# Altium PCB PCB2.PcbDoc
Units mil, origin at the board's own origin, x right, y up, seen from the top; angles counter-clockwise.
Board outline 6000 x 4000 mil, 2 copper layers (Top Layer, Bottom Layer); 37 components, 28 nets, 195 pads, 0 vias.
Unrouted connection lines stored in the file: 120.
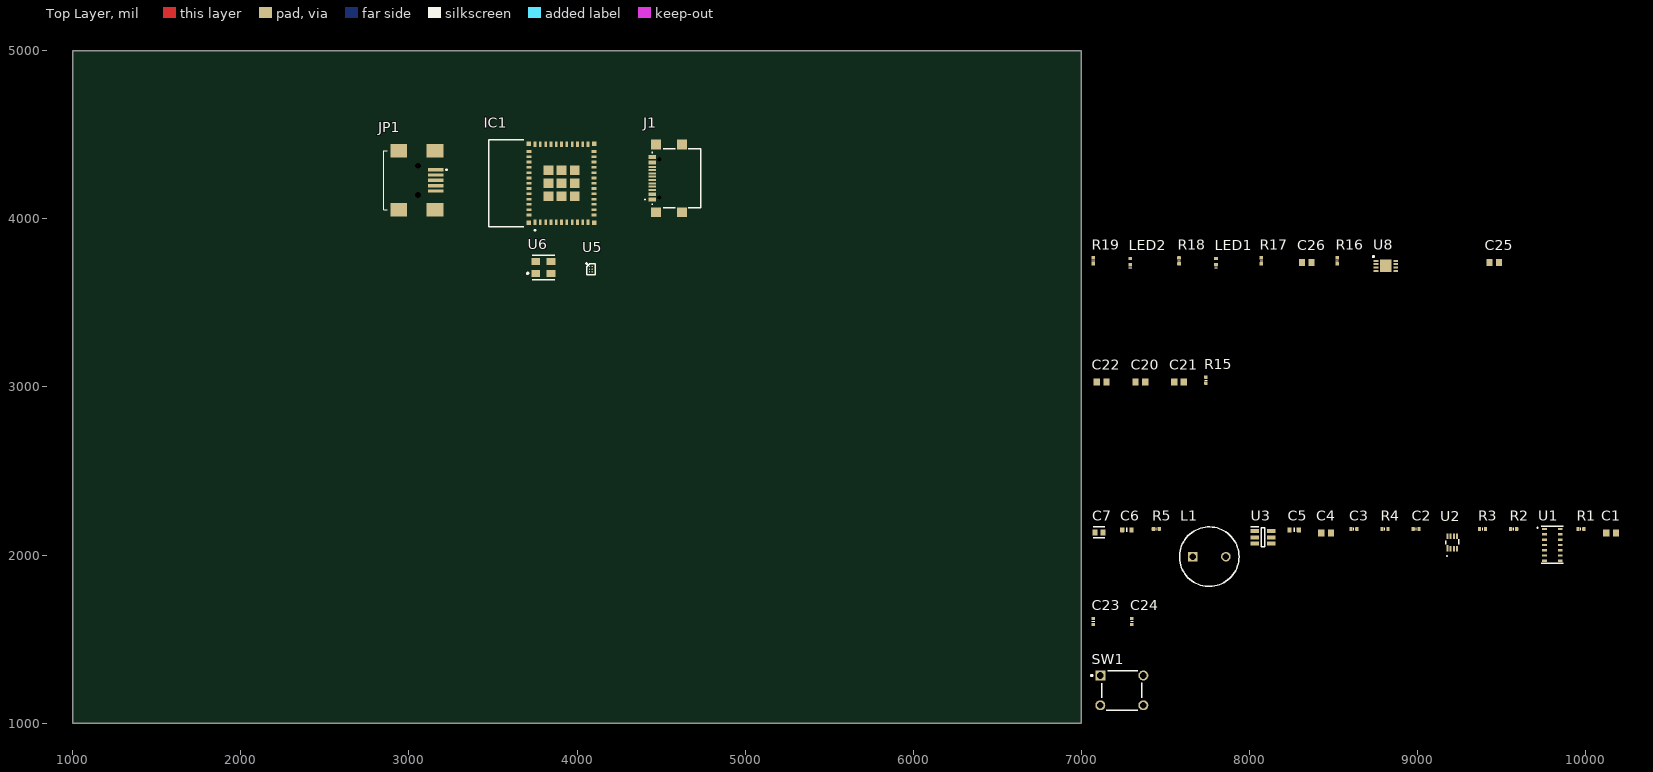
[diagram p0: Top Layer view]
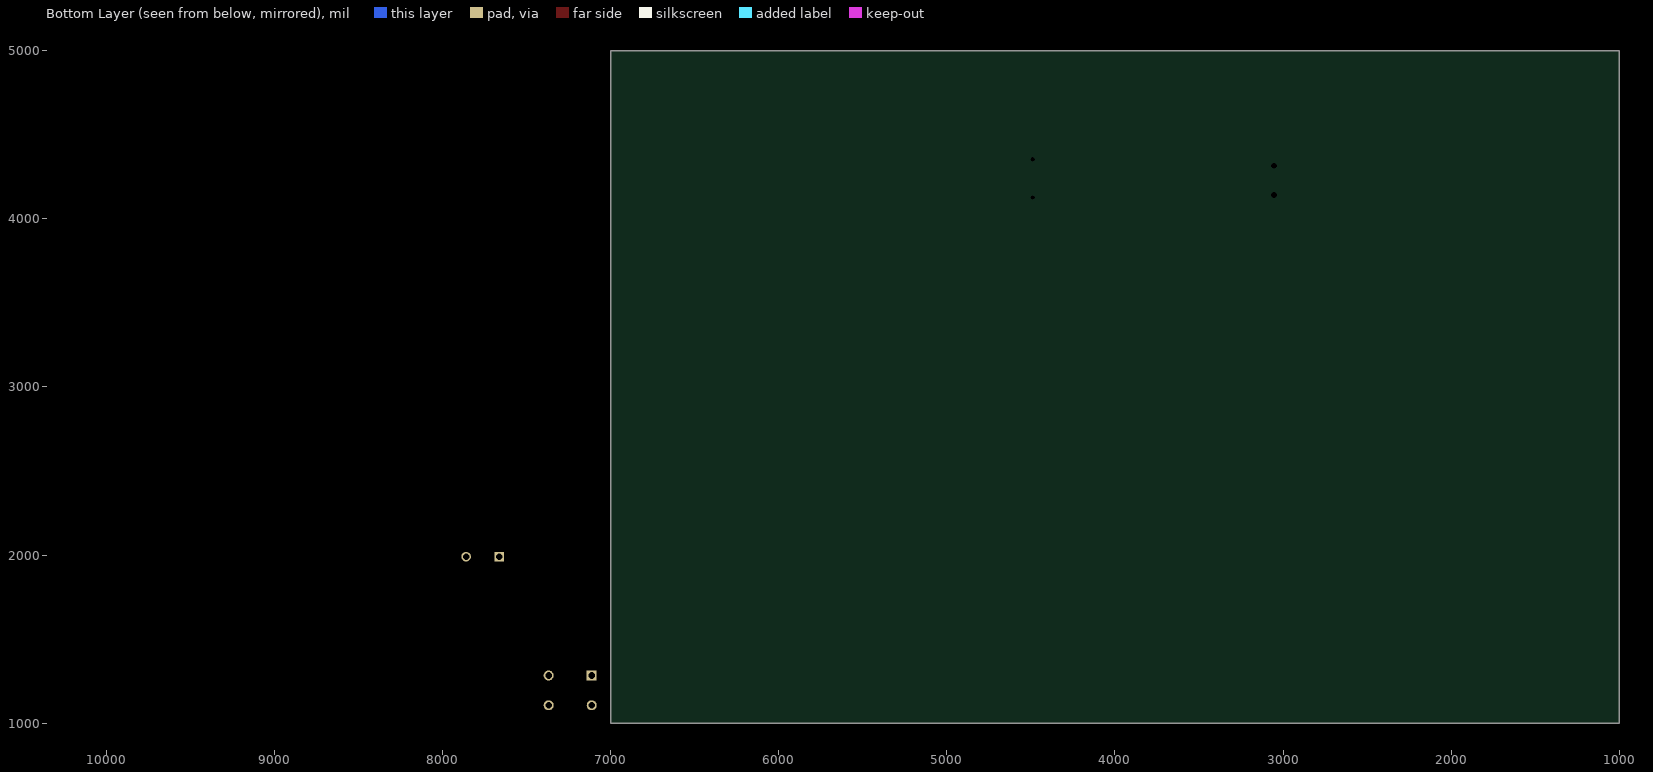
[diagram p1: Bottom Layer view, seen from below]

## Layer stack, top to bottom
Top Solder: solder mask 0.4, Solder Resist, Dk 3.5
Top Layer: signal copper 1.4
Dielectric 1: dielectric 12.6, FR-4, Dk 4.8
Bottom Layer: signal copper 1.4
Bottom Solder: solder mask 0.4, Solder Resist, Dk 3.5

## Board outline
1000,1000 7000,1000 7000,5000 1000,5000

## Design rules (kind name [scope] priority, off if disabled: settings)
Clearance [All] p1: gap=10 ignorepadtopadclearanceinfootprint=FALSE
PolygonConnect [All] p1: connectstyle=Relief reliefconductorwidth=10 reliefentries=4 polygonreliefangle="90 Angle" airgapwidth=10
RoutingVias [All] p1: holewidth=28 width=50 viastyle="Through Hole" minholewidth=28 minwidth=50 maxholewidth=28 maxwidth=50
SolderMaskExpansion [All] p1: expansion=4 istentingtop=FALSE
Width [All] p1: maxlimit=10 minlimit=10 preferedwidth=10
30 further rules are at their usual default settings.

## Classes and differential pairs
component class "Temp sensor": R12 R13 R14 U5
component class Protocol: JP1
component class Power: C25 C26 J1 LED1 LED2 R16 R17 R18 R19 U8
component class Microcontroller: C20 C21 C22 IC1 R15
component class "Heart rate and pulse oximeter": C1 C2 C3 C4 C5 C6 C7 L1 R1 R2 R3 R4 R5 U1 U2 U3
component class "Crystal Oscillator": C23 C24 U6
component class Button: SW1

## Components (designator, comment, footprint, x,y, rotation, side; value= is the part's Value field where it differs from the comment)
C1 "0.1uF" CAPC1608X90X35ML10T15 10150,2130 r0 top
C2 "Capacitor 1µF +/-20% 10V 0402" CAPC0402(1005)60_L 8990,2155 r0 top value=1µF
C3 "Capacitor 1µF +/-20% 10V 0402" CAPC0402(1005)60_L 8620,2155 r0 top value=1µF
C4 "0.1uF" CAPC1608X90X35ML10T15 8455,2130 r0 top
C5 "Capacitor 4.7µF +/-20% 10V 0603" CAPC0603(1608)100_L 8265,2150 r0 top value=4.7µF
C6 "Capacitor 4.7µF +/-20% 10V 0603" CAPC0603(1608)100_L 7270,2150 r0 top value=4.7µF
C7 "5.6nF" FP-C0603C-CF-MFG 7105,2135 r0 top value="5,600 pF"
C20 "0.1uF" CAPC1608X90X35ML10T15 7350,3030 r0 top
C21 "0.1uF" CAPC1608X90X35ML10T15 7580,3030 r0 top
C22 "0.1uF" CAPC1608X90X35ML10T15 7120,3030 r0 top
C23 "Capacitor 12pF +/-10% 50V 0402" CAPC0402(1005)33_L 7070,1605 r90 top value=12pF
C24 "Capacitor 12pF +/-10% 50V 0402" CAPC0402(1005)33_L 7300,1605 r90 top value=12pF
C25 "10uF" CAPC1608X90X35ML10T15 9455,3740 r0 top
C26 "10uF" CAPC1608X90X35ML10T15 8340,3740 r0 top
IC1 "ESP32-C3-MINI-1-H4" ESP32C3MINI1H4 3907.91,4211.02 r90 top
J1 "GSB1C41110SSHR" GSB1C41110SSHR 4580,4240 r90 top
JP1 "690-005-299-043" 690005299043 2850.28,4228.39 r0 top
L1 "RLB9012-472KL" INDR70-500-1220X900X1220 7760,1990 r0 top value=4.7µH
LED1 "QBLP595-Y" QTB-QBLP595_V 7800,3745 r90 top
LED2 "QBLP595-Y" QTB-QBLP595_V 7290,3745 r90 top
R1 "4D7KR2F" RESC0402(1005)_L 9970,2155 r0 top value=4.7k
R2 "4D7KR2F" RESC0402(1005)_L 9570,2155 r0 top value=4.7k
R3 "4D7KR2F" RESC0402(1005)_L 9385,2155 r0 top value=4.7k
R4 "4D7KR2F" RESC0402(1005)_L 8805,2155 r0 top value=4.7k
R5 "4D7KR2F" RESC0402(1005)_L 7445,2155 r0 top value=4.7k
R15 "Resistor 2K2  +/-5 % 0402 63 mW" RESC0402(1005)_L 7740,3040 r90 top value=2.2k
R16 "2KR2J" RESC0402(1005)_L 8520,3750 r90 top value=2k
R17 "Resistor 4K7  +/-1 % 0402 63 mW" RESC0402(1005)_L 8070,3750 r90 top value=4.7k
R18 "1KR2J" RESC0402(1005)_L 7580,3750 r90 top value=1k
R19 "Resistor 4K7  +/-1 % 0402 63 mW" RESC0402(1005)_L 7070,3750 r90 top value=4.7k
SW1 "B3F-1000" OMRON-B3F-1000-4_V 7240,1195 r0 top
U1 "MAX30102EFD+" 14-LEAD-OESIP 9800,2060 r0 top
U2 "MAX14595ETA+" MAX14595ETA 9205,2075 r0 top
U3 "MAX1921EUT18+" SOT95P280X145-6N 8080,2105 r0 top
U5 "TMP119AIYBGR" BGA6C40P2X3_95X149X52 4082.13,3700 r0 top
U6 "ABM8-27.120MHZ-B4-T" FP-ABM8-MFG 3800,3710 r0 top
U8 "MCP73831-2DCI_MC" SON50P300X200X100-9N-D 8810,3720 r0 top

## Footprints (in the part's own frame and the unit in brackets; to place one, negate y for a bottom-side part, rotate by r counter-clockwise, add the part's x,y. Pads: shape width x height; smd on the part's side, far side on the other; paste and mask are expansions set on the pad)
14-LEAD-OESIP [mm]
  rect 0.75x0.35 smd: 1(-1.2,2.4) 2(-1.2,1.6) 3(-1.2,0.8) 4(-1.2,0) 5(-1.2,-0.8) 6(-1.2,-1.6) 7(-1.2,-2.4) 8(1.2,-2.4) 9(1.2,-1.6) 10(1.2,-0.8) 11(1.2,0) 12(1.2,0.8) 13(1.2,1.6) 14(1.2,2.4)
  silkscreen extent -2.28,-2.8 1.65,2.8, body extent -1.4,-2.8 1.4,2.8, height 1.3
690005299043 [mm]
  rect 2.3x0.5 smd: 1(7.85,1.6) 2(7.85,0.8) 3(7.85,0) 4(7.85,-0.8) 5(7.85,-1.6)
  rect 2.5x2 smd: 6(7.75,-4.45) 7(7.75,4.45) 8(2.25,4.45) 9(2.25,-4.45)
  round 0.45 hole 0.9 unplated: 10(5.2,2.2) 11(5.2,-2.2)
  silkscreen extent 0,-4.45 9.6,4.45, body extent -0.54,-5.13 8.76,5.13, height 3.9
BGA6C40P2X3_95X149X52 [mm]
  round 0.2 smd: A1(-0.2,0.4) A2(0.2,0.4) B1(-0.2,0) B2(0.2,0) C1(-0.2,-0.4) C2(0.2,-0.4)
  silkscreen extent -0.75,-0.85 0.65,0.95, body extent -0.48,-0.74 0.48,0.74, height 0.53
CAPC0402(1005)33_L [mm] "Chip Capacitor, Body 1.0x0.5mm, Height 0.33mm, IPC High Density"
  rrect25% 0.5x0.55 smd: 1(-0.45,0) 2(0.45,0)
  silkscreen extent 0,-0.2 0,0.2, body extent -0.5,-0.25 0.5,0.25, height 0.55
CAPC0402(1005)60_L [mm] "Chip Capacitor, Body 1.0x0.5mm, Height 0.6mm, IPC High Density"
  rrect25% 0.5x0.55 smd: 1(-0.45,0) 2(0.45,0)
  silkscreen extent 0,-0.2 0,0.2, body extent -0.5,-0.25 0.5,0.25, height 0.6
CAPC0603(1608)100_L [mm] "Chip Capacitor, Body 1.6x0.8mm, Height 1.0mm, IPC High Density"
  rrect25% 0.66x0.76 smd: 1(-0.7,0) 2(0.7,0)
  silkscreen extent 0,-0.3 0,0.3, body extent -0.8,-0.4 0.8,0.4, height 0.95
CAPC1608X90X35ML10T15 [mm] "Chip Capacitor, 2-Leads, Body 1.7x0.9mm, IPC Low Density"
  rect 0.95x1.05 smd: 1(-0.725,0) 2(0.725,0)
  body extent -0.85,-0.45 0.85,0.45, height 0.9
ESP32C3MINI1H4 [mm]
  rect 0.8x0.4 smd: 1(-5.9,4) 2(-5.9,3.2) 3(-5.9,2.4) 4(-5.9,1.6) 5(-5.9,0.8) 6(-5.9,0) 7(-5.9,-0.8) 8(-5.9,-1.6) 9(-5.9,-2.4) 10(-5.9,-3.2) 11(-5.9,-4) 25(5.9,-4) 26(5.9,-3.2) 27(5.9,-2.4) 28(5.9,-1.6) 29(5.9,-0.8) 30(5.9,0) 31(5.9,0.8) 32(5.9,1.6) 33(5.9,2.4) 34(5.9,3.2) 35(5.9,4)
  rect 0.4x0.8 smd: 12(-4.8,-4.9) 13(-4,-4.9) 14(-3.2,-4.9) 15(-2.4,-4.9) 16(-1.6,-4.9) 17(-0.8,-4.9) 18(0,-4.9) 19(0.8,-4.9) 20(1.6,-4.9) 21(2.4,-4.9) 22(3.2,-4.9) 23(4,-4.9) 24(4.8,-4.9) 36(4.8,4.9) 37(4,4.9) 38(3.2,4.9) 39(2.4,4.9) 40(1.6,4.9) 41(0.8,4.9) 42(0,4.9) 43(-0.8,4.9) 44(-1.6,4.9) 45(-2.4,4.9) 46(-3.2,4.9) 47(-4,4.9) 48(-4.8,4.9)
  rect 1.45x1.45 smd: 49(0,0) 50(1.975,1.975) 51(0,1.975) 52(-1.975,1.975) 53(-1.975,0) 54(-1.975,-1.975) 55(0,-1.975) 56(1.975,-1.975) 57(1.975,0)
  rect 0.7x0.7 smd: 58(-5.95,4.95) 59(-5.95,-4.95) 60(5.95,-4.95) 61(5.95,4.95)
  silkscreen extent -7.2,3.9 6.6,11, body extent -6.6,-5.6 6.6,11, height 2.4
FP-ABM8-MFG [mm]
  rect 1.3x1.05 smd paste+0 mask+0: 1(-1.15,-0.875) 2(1.15,-0.875) 3(1.15,0.875) 4(-1.15,0.875)
  silkscreen extent -2.5,-1.88 1.7,1.88, body extent -1.9,-1.5 1.9,1.5, height 0.25
FP-C0603C-CF-MFG [mm]
  rect 0.75x0.9 smd paste+0 mask+0: 1(-0.6,0) 2(0.6,0)
  silkscreen extent -0.87,-0.85 0.88,0.85, body extent -1.2,-0.6 1.2,0.6, height 0.25
GSB1C41110SSHR [mm]
  rect 0.6x1.15 smd: A1(-3.2,3.39) A4(-2.4,3.39) A9(2.4,3.39) A12(3.2,3.39)
  rect 0.3x1.15 smd: A5(-1.25,3.39) A6(-0.25,3.39) A7(0.25,3.39) A8(1.25,3.39) B5(1.75,3.39) B6(0.75,3.39) B7(-0.75,3.39) B8(-1.75,3.39)
  round 0.325 hole 0.65 unplated: MH1(-2.89,2.315) MH2(2.89,2.315)
  rect 1.5x1.5 smd: MP1(-5.12,2.815) MP2(5.12,2.815) MP3(-5.12,-1.115) MP4(5.12,-1.115)
  silkscreen extent -4.47,-3.97 4.47,4.5, body extent -5.67,-4.09 5.67,3.51, height 3.12
INDR70-500-1220X900X1220 [mm] "THD, 2-Leads, Dia 9mm"
  rect 1.45x1.45 hole 0.95: 1(-2.5,0)
  round 1.45 hole 0.95: 2(2.5,0)
  silkscreen extent -4.5,-4.5 4.5,4.5, body extent -4.5,-4.5 4.5,4.5, height 12.2
MAX14595ETA [mm]
  rect 0.3x0.95 smd: 1(-0.75,-0.9)
  rect 0.3x0.85 smd: 2(-0.25,-0.95) 3(0.25,-0.95) 4(0.75,-0.95) 5(0.75,0.95) 6(0.25,0.95) 7(-0.25,0.95) 8(-0.75,0.95)
  silkscreen extent -1,-2.1 1,0.5, body extent -1,-1 1,1, height 0.9
OMRON-B3F-1000-4_V [mm] "TH, 4-Leads, Body 6x6mm"
  rect 1.5x1.5 hole 1 paste-2539.97: 1(-3.25,2.25)
  round 1.5 hole 1 paste-2539.97: 2(3.25,2.25) 4(3.25,-2.25)
  round 1.5 hole 1 paste-2539.97 mask+0.102: 3(-3.25,-2.25)
  silkscreen extent -4.67,-3 3,3, body extent -3,-3 3,3, height 4.5
QTB-QBLP595_V [mm] "SMD, 2-Leads, Body 1x0.5mm"
  rrect25% 0.5x0.55 smd: 1(-0.455,0) 2(0.455,0)
  silkscreen extent -0.9,-0.2 -0.9,0.2, body extent -0.5,-0.25 0.5,0.25, height 0.5
RESC0402(1005)_L [mm] "Chip Resistor, Body 1.0x0.5mm, IPC High Density"
  rrect25% 0.5x0.55 smd: 1(-0.45,0) 2(0.45,0)
  silkscreen extent 0,-0.2 0,0.2, body extent -0.5,-0.25 0.5,0.25, height 0.3
SON50P300X200X100-9N-D [mm]
  rect 0.75x0.3 smd: 1(-1.5,0.75) 2(-1.5,0.25) 3(-1.5,-0.25) 4(-1.5,-0.75) 5(1.5,-0.75) 6(1.5,-0.25) 7(1.5,0.25) 8(1.5,0.75)
  rect 1.75x1.9 smd: 9(0,0)
  silkscreen extent -2,1.28 -1.75,1.52, body extent -1.55,-1 1.55,1, height 1
SOT95P280X145-6N [mm]
  rect 1.25x0.6 smd: 1(-1.25,0.95) 2(-1.25,0) 3(-1.25,-0.95) 4(1.25,-0.95) 5(1.25,0) 6(1.25,0.95)
  silkscreen extent -1.88,-1.45 0.28,1.6, body extent -1.4,-1.45 1.4,1.45, height 1.45

## Part data
C1 C4 C20 C21 C22 C25 C26: library part CMP-2100-03643-1, "Chip Capacitor, 0.1 uF, +/- 10%, 50 V, -55 to 125 degC, 0603 (1608 Metric), RoHS, Tape and Reel", Capacitance=100nF, Case Code (Imperial)=0603, Case Code (Metric)=1608, Dielectric=X7R, Dielectric Material=Ceramic, Insulation Resistance=10GR, Manufacturer=Murata, Max Operating Temperature=125degC, Min Operating Temperature=-55degC, Package Description="2-Pin Surface Mount Device, Body 1.6 x 0.8 mm", Package Quantity=1, Tolerance=10%, Voltage=50V, Case/Package=0603, Contact Plating=Tin, Datasheet URL=http://psearch.en.murata.com/capacitor/product/GRM188R71H104KA93%23.pdf, Datasheet Version=42675.0, Depth=0.8mm, Height=0.8mm, Lead Free=LeadFree, Length=1.6mm, Manufacturer URL=http://www.murata.com/, Material=Ceramic, Mount=SurfaceMount, Number of Pins=2, Package Reference=0603, Packaging=TapeandReel, Radiation Hardening=No, REACH SVHC=NoSVHC, RoHSCompliant=true, Termination=SMD/SMT, Thickness=0.035inch, Voltage Rating=50V, Voltage Rating (DC)=50V, Width=0.8mm
C2 C3: library part CMP-001-00063-3, "Chip Capacitor, 1µF +/-20%, 10V, 0402, Thickness 0.6 mm", Case/Package=0402, Max Operating Temperature=85°C, Min Operating Temperature=-55°C, Tolerance=10%, Voltage Rating=10V, Mounting Technology=SMT, Pins=2
C5 C6: library part CMP-001-00076-4, "Chip Capacitor, 4.7µF +/-20%, 10V, 0603, Thickness 1 mm", Case/Package=0603, Max Operating Temperature=85°C, Min Operating Temperature=-55°C, Tolerance=10%, Voltage Rating=10V, Mounting Technology=SMT, Pins=2
C7: library part CMP-2006-03359-2, "CAP CER 5600PF 50V NP0 0603", Capacitance="5,600 pF", Manufacturer=KEMET, Manufacturer Part Number=C0603C562J5GACTU, Package=C0603C-CF, Temperature="-55°C to +125°C", Temperature Characteristic=C0G, Temperature Coefficient=30ppm/°C, Temperature Range High=+125°C, Temperature Range Low=-55°C, Tolerance=0.05, Voltage Rating="50 V", Automotive=Yes, Automotive Grade="Grade 1", Category=Cap, ComponentLink2Description=Datasheet, ComponentLink2URL=https://api.kemet.com/component-edge/download/datasheet/C0603C100J5GACAUTO.pdf, Device Class L1="Passive Components", Device Class L2=Capacitors, Device Class L3="Ceramic Capacitors", Digikey Description="CAP CER 5600PF 50V NP0 0603", Height=0.87mm, Lead Free=Yes, Material=Ceramic, Mouser Description="Multilayer Ceramic Capacitors MLCC - SMD/SMT 50volts 5600pF 5% C0G", Octopart=https://octopart.com/c0603c562j5gactu-kemet-13174209, RoHS=TRUE
C23 C24: library part CMP-001-00072-4, "Chip Capacitor, 12pF +/-10%, 50V, 0402, Thickness 0.33 mm", Case/Package=0402, Max Operating Temperature=85°C, Min Operating Temperature=-55°C, Tolerance=20%, Voltage Rating=50V, Mounting Technology=SMT, Pins=2
IC1: "Integrated Circuit", Manufacturer_Name="Espressif Systems", Mouser Part Number=356-ESP32-C3-MINI1H4, Datasheet Link=https://www.mouser.es/datasheet/2/891/Espressif_ESP32_C3_MINI_1_Datasheet-2006822.pdf, Height=2.55mm, Manufacturer_Part_Number=ESP32-C3-MINI-1-H4, Mouser Price/Stock=https://www.mouser.co.uk/ProductDetail/Espressif-Systems/ESP32-C3-MINI-1-H4?qs=stqOd1AaK78JkwNX13Q9hQ%3D%3D
J1: "Connector", Manufacturer_Name="Amphenol Communications Solutions", Datasheet Link=https://cdn.amphenol-cs.com/media/wysiwyg/files/drawing/gsb1c41x10sshr-ax1.pdf, Height=3.41mm, Manufacturer_Part_Number=GSB1C41110SSHR
JP1: "Connector", Manufacturer_Name=EDAC, Mouser Part Number=587-690-005-299-043, Datasheet Link=https://datasheet.datasheetarchive.com/originals/distributors/Datasheets-DGA2/216278.pdf, Height=3.98mm, Manufacturer_Part_Number=690-005-299-043, Mouser Price/Stock=https://www.mouser.co.uk/ProductDetail/EDAC/690-005-299-043?qs=Vpv2%252BhtnxQIs8OWWDFbyVg%3D%3D
L1: library part CMP-006-00016-6, "Radial Inductor, 4.7 mH, +/- 10%, 0.24 A, -55 to 125 degC, 2-Pin THD, RoHS, Bulk", Case/Package=Radial, Current Rating=240mA, Inductance Tolerance=5%, Manufacturer=Bourns, Max Operating Temperature=125°C, Min Operating Temperature=-55°C, Package Description="2-Pin Through Hole Device, Dia 9 mm, Height 12.2 mm", Package Quantity=200, Package Reference=INDR70-500-1220X900X1220, Self Resonant Frequency=500kHz, Tolerance=10%, Core Material=Ferrite, Datasheet URL=http://www.bourns.com/docs/Product-Datasheets/rlb9012.pdf, Datasheet Version=Mar-15, Lead Pitch=5mm, Mounting Technology=TH, Packaging=Bulk, Pins=2, Q Factor=15, RoHS Compliant=True, Shielding=Unshielded
LED1 LED2: library part CMP-007-00043-3, "Chip LED 0402, Yellow, 0.02 A, 3.1 to 3.7 V, -40 to 80 degC, 2-Pin SMD, RoHS, Tape and Reel", Case/Package=0402, Colour=Yellow, Mounting Technology=SMT, Pins=2, RoHS Compliant=Yes
R1 R2 R3 R4 R5: library part CMP-009-00105-2, "4K7 0.063W 1% 0402 (1005 Metric)  SMD", Case/Package=0402, Power=63mW, Tolerance=1%, Mounting Technology=SMT, Pins=2
R15: library part CMP-009-00166-3, "Chip Resistor, 2,2 kOhms, +/-5 %, 63 mW, -55 to 155 degC, 0402", Case/Package=0402, Max Operating Temperature=155°C, Min Operating Temperature=-55°C, Power=63mW, Tolerance=5%, Pins=2
R16: library part CMP-009-00091-2, "2K 0.063W 5% 0402 (1005 Metric)  SMD", Case/Package=0402, Power=63mW, Tolerance=5%, Mounting Technology=SMT, Pins=2
R17 R19: library part CMP-009-00158-3, "Chip Resistor, 4,7 kOhms, +/-1 %, 63 mW, -55 to 155 degC, 0402", Case/Package=0402, Max Operating Temperature=155°C, Min Operating Temperature=-55°C, Power=63mW, Tolerance=1%, Pins=2
R18: library part CMP-009-00075-2, "1K 0.063W 5% 0402 (1005 Metric)  SMD", Case/Package=0402, Power=63mW, Tolerance=5%, Mounting Technology=SMT, Pins=2
SW1: library part CMP-1677-00002-1, "Tactile Switch, SPST-NO, 0.05 A, 5 to 24 V, -25 to 70 degC, 4-Pin THD, RoHS, Bulk", Capacitance="-45 f", Current Rating="1.5 A", Max Operating Temperature="70 degC", Min Operating Temperature="-40 degC", Package Quantity=1080, Voltage Rating="150 V", ComponentLink1Description="Manufacturer URL", ComponentLink1URL=http://www.omron.com/, ComponentLink2Description=Datasheet, ComponentLink2URL=http://www.omron.com/ecb/products/pdf/en-b3f.pdf, Contact Material=Brass, Contact Plating=Gold, DatasheetVersion=Jan-15, Gender=Female, Height="14.99 mm", Lead Pitch="1.27 mm", Length="18.34 mm", Mount="Through Hole", PackageDescription="4-Pin Through Hole Device, Body 6 x 6 mm", PackageReference=B3F-1000, Packaging=Tray, Pins=8, Radiation Hardening=No, RoHSCompliant=true, Shielding=Shielded, Width="25.4 mm"
U1: "Integrated Circuit", Manufacturer_Name="Analog Devices", Mouser Part Number=700-MAX30102EFD+, Datasheet Link=https://datasheets.maximintegrated.com/en/ds/MAX30102.pdf, Manufacturer_Part_Number=MAX30102EFD+, Mouser Price/Stock=https://www.mouser.co.uk/ProductDetail/Analog-Devices-Maxim-Integrated/MAX30102EFD%2b?qs=nVS1qgv%252BQrk9UYEvS27V%2Fg%3D%3D
U2: "Integrated Circuit", Manufacturer_Name="Analog Devices", Mouser Part Number=700-MAX14595ETA+, Datasheet Link=https://www.mouser.it/datasheet/2/256/MAX14595-471922.pdf, Height=0.8mm, Manufacturer_Part_Number=MAX14595ETA+, Mouser Price/Stock=https://www.mouser.co.uk/ProductDetail/Maxim-Integrated/MAX14595ETA%2b?qs=Or6ezLSzmEvDejm1TC8ZVA%3D%3D
U3: "Integrated Circuit", Manufacturer_Name="Analog Devices", Datasheet Link=https://datasheet.datasheetarchive.com/originals/distributors/SFDatasheet-4/sf-00087114.pdf, Height=1.45mm, Manufacturer_Part_Number=MAX1921EUT18+
U5: "Integrated Circuit", Manufacturer_Name="Texas Instruments", Mouser Part Number=595-TMP119AIYBGR, Datasheet Link=https://www.ti.com/lit/ds/symlink/tmp119.pdf?ts=1711471230059&ref_url=https%253A%252F%252Fwww.ti.com%252Fsitesearch%252Fen-us%252Fdocs%252Funiversalsearch.tsp%253FlangPref%253Den-US%2526searchTerm%253Dtmp119%2526nr%253D70, Height=0.525mm, Manufacturer_Part_Number=TMP119AIYBGR, Mouser Price/Stock=https://www.mouser.co.uk/ProductDetail/Texas-Instruments/TMP119AIYBGR?qs=dbcCsuKDzFUz%2FSabBerKMA%3D%3D
U6: library part CMP-27762-000994-1, "Crystal 27.12MHz ±30ppm 18pF SMD-4 3.2mm x 2.5mm", Capacitance=1.8E-11F, Case/Package=SMD/SMT, ESR (Equivalent Series Resistance)=50R, Frequency=27.12MHz, Frequency Stability=50ppm, Frequency Tolerance=30ppm, Load Capacitance=18pF, Max Operating Temperature=70°C, Min Operating Temperature=-20°C, Height=0.031inch, Lead Free="Lead Free", Length=0.126inch, Mount="Surface Mount", Packaging="Tape and Reel", RoHS Compliant=Yes, Width=0.098inch
U8: "Integrated Circuit", Arrow Part Number=MCP73831-2DCI/MC, Manufacturer_Name=Microchip, Mouser Part Number=579-MCP73831-2DCI/MC, Arrow Price/Stock=https://www.arrow.com/en/products/mcp73831-2dcimc/microchip-technology?region=nac, Datasheet Link=https://www.arrow.com/en/products/mcp73831-2dcimc/microchip-technology, Height=1mm, Manufacturer_Part_Number=MCP73831-2DCI/MC, Mouser Price/Stock=https://www.mouser.co.uk/ProductDetail/Microchip-Technology/MCP73831-2DCI-MC?qs=hH%252BOa0VZEiBQ%2FrptDRXKdg%3D%3D

## Nets (pads, with @x,y where several pads share a name; then routed paths per layer and width w, separated by ;. In a path a pad name is that pad's centre, name@x,y a point inside that pad or via, vN(x,y) a via of type N, cw(c..) or ccw(c..) an arc to the next point about the centre after c; other vN are vias at no path point)
1.8V: C2.1 C4.2 C5.1 C7.2 L1.2 R1.1 R3.1 U2.1 U2.4
Button: IC1.16 SW1.1 SW1.2
CHIP_EN: C22.1 IC1.8 R15.1
GND: C1.1 C4.1 C5.2 C6.1 C20.2 C21.2 C22.2 C23.1 C24.1 JP1.5 JP1.6 JP1.7 JP1.8 JP1.9 SW1.3 SW1.4 U1.4 U1.12 U2.5 U3.2 U3.5 U5.B2 U5.C1 U6.2 U6.4
GPIO2: IC1.5 U5.C2
GPIO4: IC1.18 JP1.4
GPIO5: IC1.19 JP1.3
GPIO6: IC1.20 JP1.2
GPIO7: IC1.21 JP1.1
GPIO18: IC1.26 R2.1 U2.7 U5.A2
GPIO19: IC1.27 R4.2 U2.6 U5.A1
NetC2_2: C2.2 U1.11
NetC3_2: C3.2 U1.9 U1.10
NetC7_1: C7.1 R5.1 U3.4
NetC25_1: C25.1 C26.2 IC1.1 IC1.2 IC1.11 IC1.14 IC1.36 IC1.37 IC1.38 IC1.39 IC1.40 IC1.41 IC1.42 IC1.43 IC1.44 IC1.45 IC1.46 IC1.47 IC1.48 IC1.49 IC1.50 IC1.51 IC1.52 IC1.53 IC1.54 IC1.55 IC1.56 IC1.57 IC1.58 IC1.59 IC1.60 IC1.61 J1.A1 J1.A12 LED2.1 R16.2 R17.1 U8.6
NetC26_1: C26.1 J1.A4 LED1.2
NetJ1_A5: J1.A5 R17.2
NetL1_1: L1.1 R5.2 U3.6
NetLED1_1: LED1.1 R18.2
NetLED2_2: LED2.2 R19.2
NetR1_2: R1.2 U1.2 U2.2
NetR3_2: R3.2 U1.3 U2.3
NetR16_1: R16.1 U8.8
NetR18_1: R18.1 R19.1 U8.5
To_Lipo_Bat: C20.1 C21.1 C25.2 IC1.3 R15.2 U8.3
VIN: C1.2 C3.1 C6.2 R2.2 R4.1 U2.8 U3.1 U3.3 U5.B1
XTAL_32K_N: C24.2 IC1.13 U6.3
XTAL_32K_P: C23.2 IC1.12 U6.1
pads on no net: IC1.4 IC1.6 IC1.7 IC1.9 IC1.10 IC1.15 IC1.17 IC1.22 IC1.23 IC1.24 IC1.25 IC1.28 IC1.29 IC1.30 IC1.31 IC1.32 IC1.33 IC1.34 IC1.35 J1.A6 J1.A7 J1.A8 J1.A9 J1.B5 J1.B6 J1.B7 J1.B8 J1.MH1 J1.MH2 J1.MP1 J1.MP2 J1.MP3 J1.MP4 JP1.10 JP1.11 U1.1 U1.5 U1.6 U1.7 U1.8 U1.13 U1.14 U8.1 U8.2 U8.4 U8.7 U8.9